# Altium PCB Charger.PcbDoc
Units mil, origin at the board's own origin, x right, y up, seen from the top; angles counter-clockwise.
Board outline 2000 x 1850 mil, 2 copper layers (Top Layer, Bottom Layer); 42 components, 28 nets, 114 pads, 23 vias.
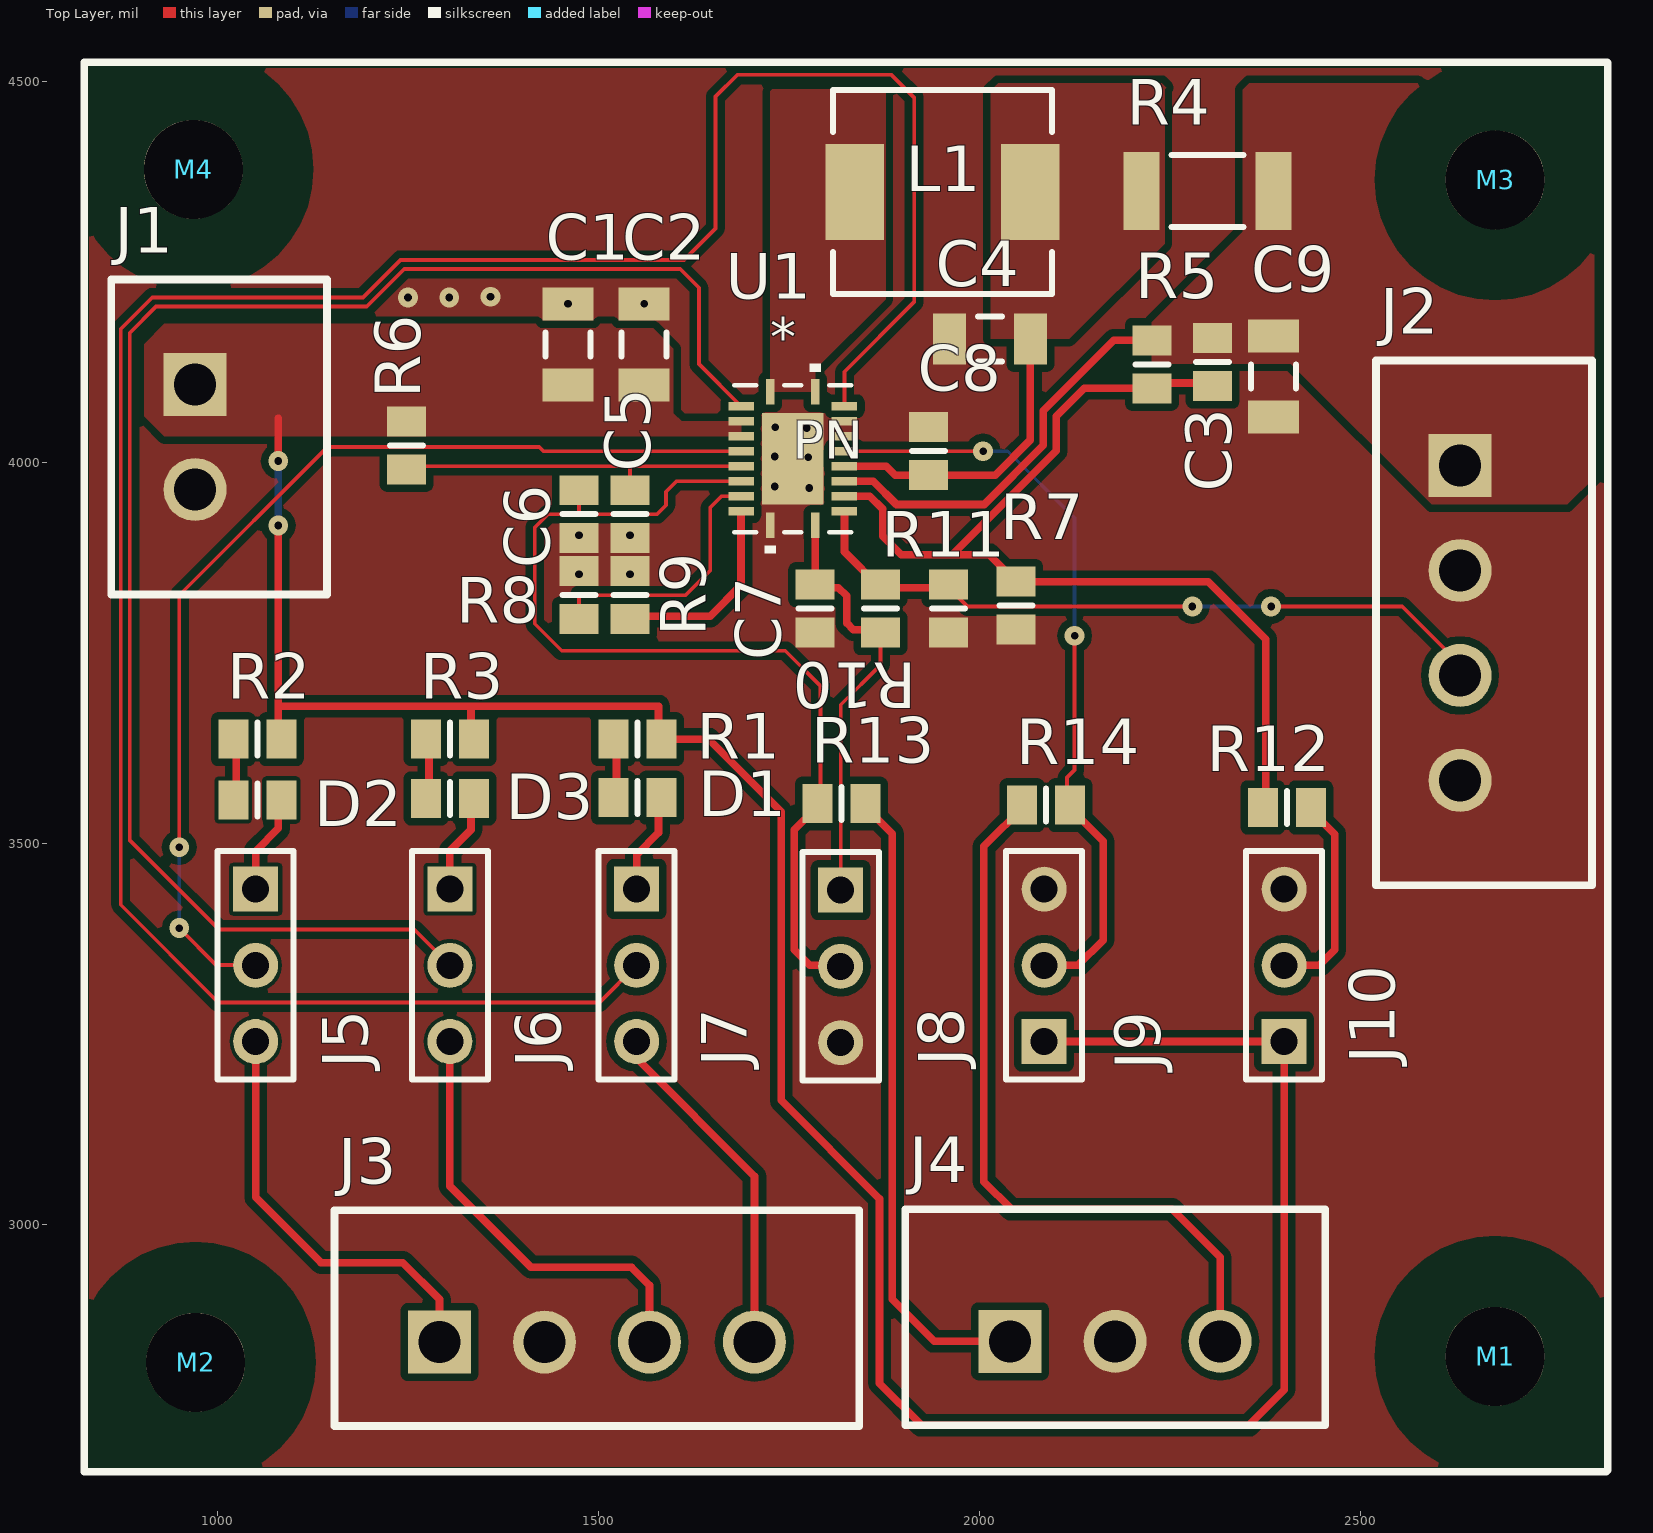
[diagram p0: Top Layer view]
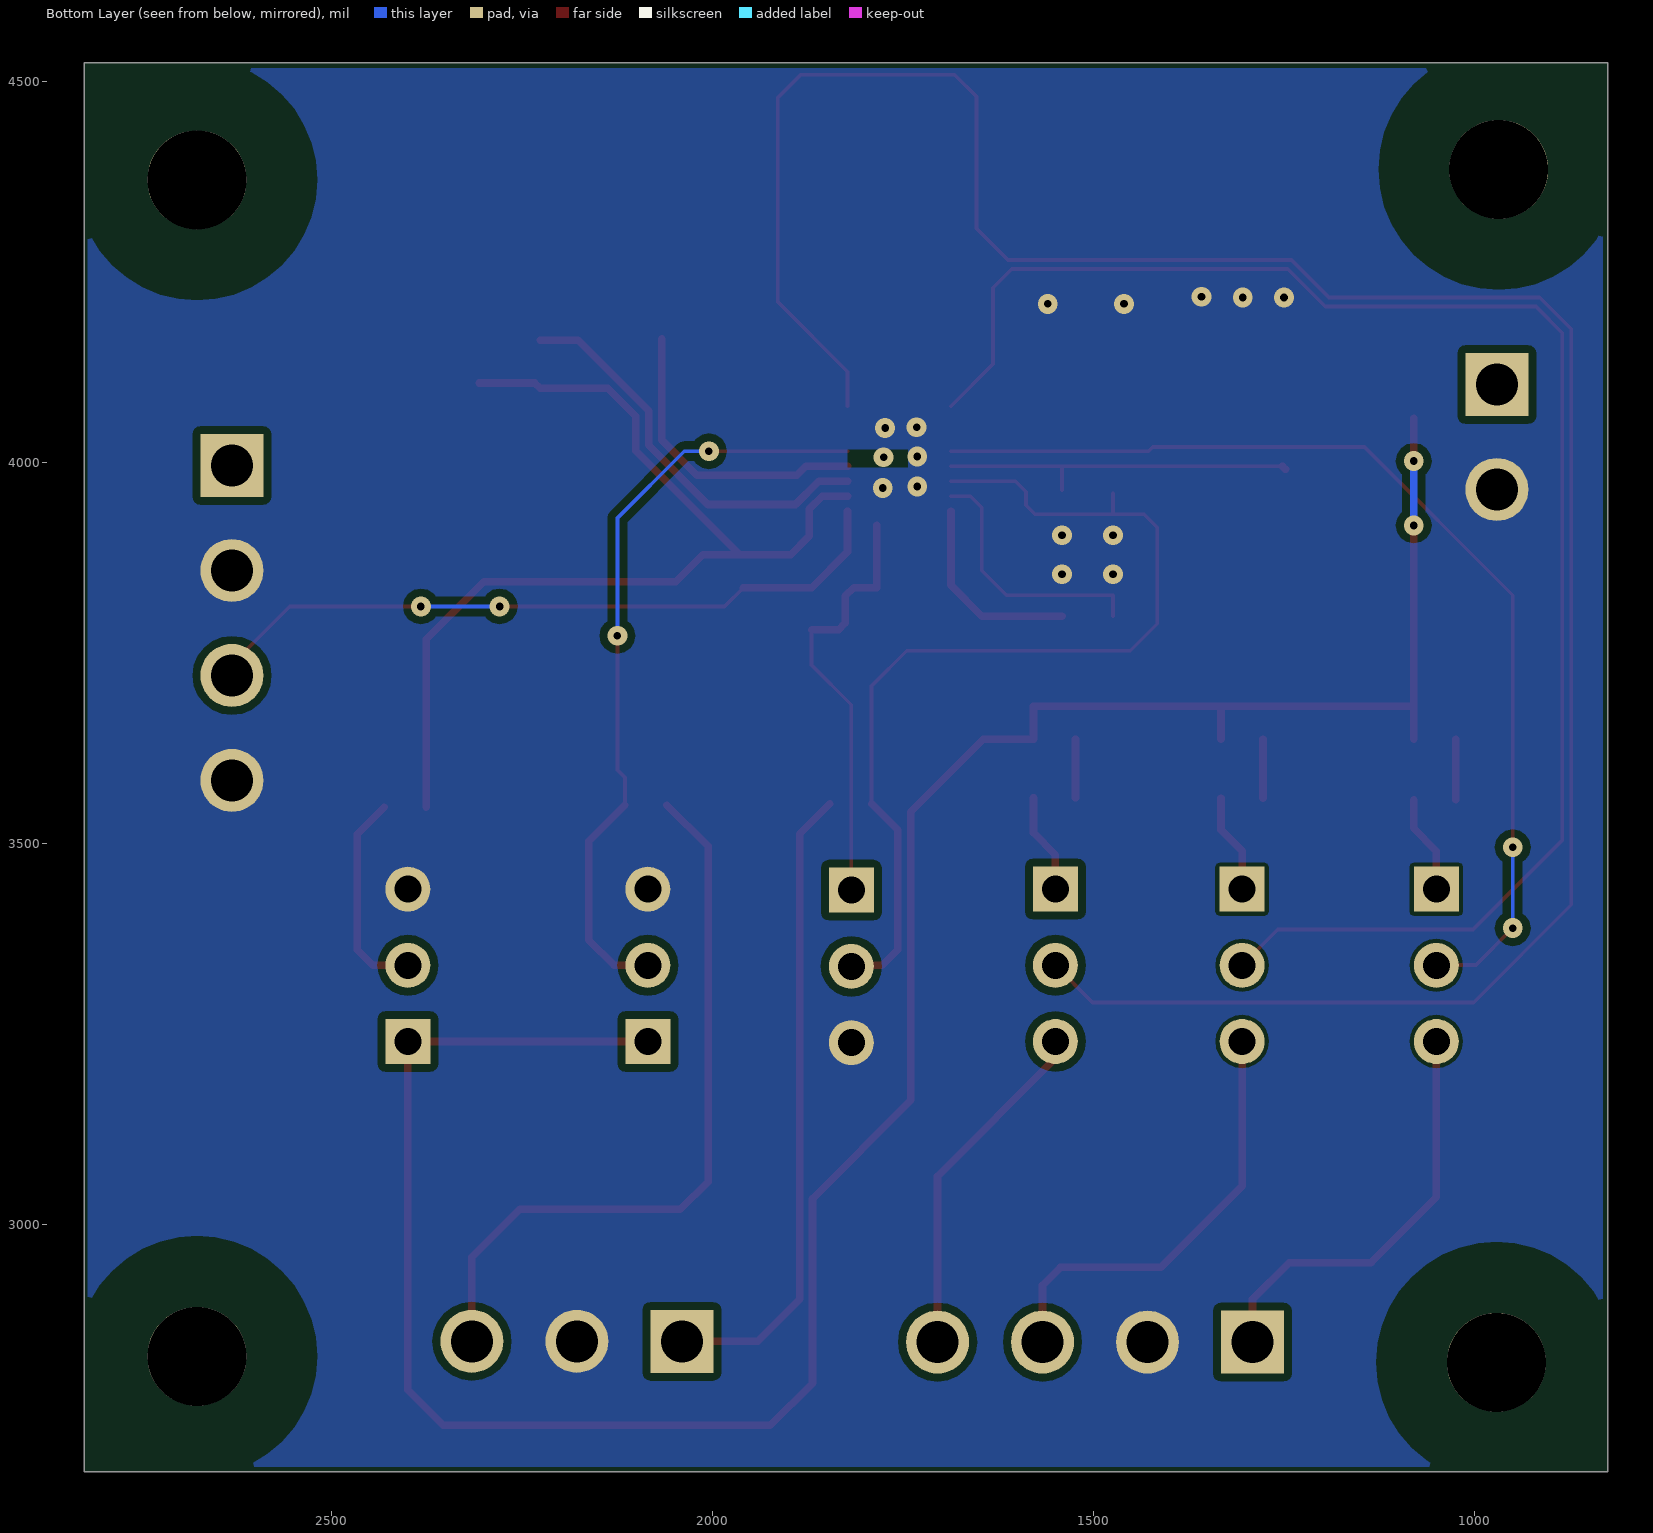
[diagram p1: Bottom Layer view, seen from below]

## Layer stack, top to bottom
Top Solder: solder mask 0.4, Solder Resist, Dk 3.5
Top Layer: signal copper 1.4
Dielectric 1: dielectric 12.6, FR-4, Dk 4.8
Bottom Layer: signal copper 1.4
Bottom Solder: solder mask 0.4, Solder Resist, Dk 3.5

## Board outline
825,2675 825,4525 2825,4525 2825,2675

## Design rules (kind name [scope] priority, off if disabled: settings)
AcuteAngle [All] p1: minimum=4.50000000000000E+0001 checktracksonly=FALSE
AssemblyTestPointUsage [All] p1: valid=2
Clearance Clearance_NetTie [TouchesRoom('U1')AND InNet('AGND') vs TouchesRoom('U1')AND InNet('PGND')] p1: gap=0 ignorepadtopadclearanceinfootprint=FALSE
Clearance Clearance_3 [All vs InComponent('D2')] p2: gap=5 ignorepadtopadclearanceinfootprint=FALSE except(0: Arc-Hole Track-Hole SMDPad-Hole THPad-Hole Via-Hole Fill-Hole Poly-Hole Region-Hole Text-Hole)
Clearance Clearance_2 [All vs InComponent('J5')] p3: gap=5 ignorepadtopadclearanceinfootprint=FALSE except(0: Arc-Hole Track-Hole SMDPad-Hole THPad-Hole Via-Hole Fill-Hole Poly-Hole Region-Hole Text-Hole)
Clearance Clearance_1 [All vs InComponent('J6')] p4: gap=5 ignorepadtopadclearanceinfootprint=FALSE except(0: Arc-Hole Track-Hole SMDPad-Hole THPad-Hole Via-Hole Fill-Hole Poly-Hole Region-Hole Text-Hole)
Clearance Clearance_Keepouts [((IsTrack Or IsArc) And Not InPoly) And IsFree and IsKeepOut vs ((IsTrack Or IsArc) And Not InPoly) And IsFree and IsKeepOut] p5: gap=0 ignorepadtopadclearanceinfootprint=FALSE
Clearance Clearance_BoardEdge_MountingHoles [OnCopper and InComponentClass('Mounting Holes') vs IsKeepOut] p6: gap=40 ignorepadtopadclearanceinfootprint=FALSE except(0: Arc-Hole Track-Hole SMDPad-Hole THPad-Hole Via-Hole Fill-Hole Poly-Hole Region-Hole Text-Hole)
Clearance Clearance_BoardEdge_Poly [OnCopper and InPoly vs IsKeepOut] p7: gap=20 ignorepadtopadclearanceinfootprint=FALSE except(0: Arc-Hole Track-Hole SMDPad-Hole THPad-Hole Via-Hole Fill-Hole Poly-Hole Region-Hole Text-Hole)
Clearance Clearance_BoardEdge [OnCopper and Not InComponentClass('Logo') and not InComponentClass('FiducialMark') and not InRegion(1000,500,4000,800) and Not IsKeepout vs IsKeepOut] p8: gap=20 ignorepadtopadclearanceinfootprint=FALSE except(0: Arc-Hole Track-Hole SMDPad-Hole THPad-Hole Via-Hole Fill-Hole Poly-Hole Region-Hole Text-Hole)
Clearance Clearance_Poly [InPolygon] p9: gap=10 ignorepadtopadclearanceinfootprint=FALSE except(0: Arc-Hole Track-Hole SMDPad-Hole THPad-Hole Via-Hole Fill-Hole Poly-Hole Region-Hole Text-Hole)
Clearance [All] p10: gap=7 ignorepadtopadclearanceinfootprint=FALSE except(0: Arc-Hole Track-Hole SMDPad-Hole THPad-Hole Via-Hole Fill-Hole Poly-Hole Region-Hole Text-Hole)
ComponentClearance ComponentClearance_L1L2 [InComponent('L1') vs InComponent('L2')] p1: gap=0 collisioncheckmode=3 verticalgap=0 showdistances=FALSE
ComponentClearance ComponentClearance_NetTie [InComponent('NT1') vs TouchesRoom('U1')] p2: gap=0 collisioncheckmode=3 verticalgap=0 showdistances=FALSE
ComponentClearance ComponentClearance_MountingHoles_FiducialMarks [InComponentClass('Mounting Holes') vs InComponentClass('FiducialMark')] p3: gap=50 collisioncheckmode=3 verticalgap=10 showdistances=FALSE
ComponentClearance ComponentClearance_Shunt [InComponentClass('Header') vs InComponentClass('Shunt')] p4: gap=0 collisioncheckmode=3 verticalgap=0 showdistances=FALSE
ComponentClearance ComponentClearance_Logo [InComponentClass('Logo')] p5: gap=50 collisioncheckmode=3 verticalgap=10 showdistances=FALSE
ComponentClearance ComponentClearance_ScrewToNut [(HasFootprint('NY PMS 440 0025 PH')) vs (HasFootprint('Keystone_1902C'))] p6: gap=5 collisioncheckmode=3 verticalgap=10 showdistances=FALSE
ComponentClearance ComponentClearance_MountingHoles [InComponentClass('Mounting Holes')] p7: gap=10 collisioncheckmode=3 verticalgap=0 showdistances=FALSE
ComponentClearance ComponentClearance_SmallPassives [HasFootprint('0201*') or HasFootprint('0402*') or HasFootprint('0508') or HasFootprint('0603*') or HasFootprint('0612') or HasFootprint('0805*') or HasFootprint('0815*') or HasFootprint('0830*') or HasFootprint('1206*') or HasFootprint('1210*') or HasFootprint('1808*') or HasFootprint('1812*') or HasFootprint('1825*') or HasFootprint('2010*') or HasFootprint('2220*') or HasFootprint('2225*') or HasFootprint('2512*') or HasFootprint('2728*') or HasFootprint('3518*') vs HasFootprint('0201*') or HasFootprint('0402*') or HasFootprint('0508') or HasFootprint('0603*') or HasFootprint('0612') or HasFootprint('0805*') or HasFootprint('0815*') or HasFootprint('0830*') or HasFootprint('1206*') or HasFootprint('1210*') or HasFootprint('1808*') or HasFootprint('1812*') or HasFootprint('1825*') or HasFootprint('2010*') or HasFootprint('2220*') or HasFootprint('2225*') or HasFootprint('2512*') or HasFootprint('2728*') or HasFootprint('3518*')] p8: gap=10 collisioncheckmode=3 verticalgap=10 showdistances=FALSE
ComponentClearance ComponentClearance_THtoSMT [IsThruComponent vs IsSMTComponent] p9: gap=10 collisioncheckmode=3 verticalgap=10 showdistances=FALSE
ComponentClearance ComponentClearance_THtoTH [IsThruComponent vs IsThruComponent] p10: gap=20 collisioncheckmode=3 verticalgap=30 showdistances=FALSE
ComponentClearance [All] p11: gap=8 collisioncheckmode=3 verticalgap=10 showdistances=FALSE
DiffPairsRouting [All] p1: maxlimit=100 minlimit=10 mostfreqgap=10 toplayer_minwidth=15 toplayer_maxwidth=15 toplayer_prefwidth=15 bottomlayer_minwidth=15 bottomlayer_maxwidth=15 bottomlayer_prefwidth=15 maxuncoupledlength=1000
FabricationTestPointUsage TestPointUsage [All] p1: valid=2 allowmultiple=FALSE
FabricationTestpoint Testpoint [All] p1: side=3 testpointundercomponent=TRUE minsize=40 maxsize=100 preferedsize=60 minholesize=0 maxholesize=40 preferedholesize=32 testpointgrid=1 allowsidetop=TRUE allowsidebottom=TRUE usegrid=TRUE gridtolerance=0.01
FanoutControl Fanout_LCC [IsLCC] p1: bgadir=Out bgaviamode=Centered fanoutstyle=Auto fanoutdirection=Alternating viagrid=1 // Fanout_LCC (Default Rule)
FanoutControl Fanout_BGA [IsBGA] p2: bgadir=Out bgaviamode=Centered fanoutstyle=Auto fanoutdirection=Alternating viagrid=1 // Fanout_BGA (Default Rule)
FanoutControl Fanout_Default [All] p4: bgadir=Out bgaviamode=Centered fanoutstyle=Auto fanoutdirection=Alternating viagrid=1 // Fanout_Default (Default Rule)
FanoutControl Fanout_Small [(CompPinCount < 5)] p5: bgadir=Out bgaviamode=Centered fanoutstyle=Auto fanoutdirection=OutThenIn viagrid=1 // Fanout_Small (Default Rule)
HoleSize [All] p1: absolutevalues=TRUE maxlimit=500 minlimit=7 maxpercent=80.000 minpercent=20.000
MinimumAnnularRing MinimumAnnularRing_ThermalPadVias [IsVia and InAnyComponent] p1: minimumring=4
MinimumAnnularRing [All] p2: minimumring=6
MinimumSolderMaskSliver MinimumSolderMaskSliver_Logo [InComponentClass('Logo') vs InComponentClass('Logo')] p1: minsoldermaskwidth=0.7
MinimumSolderMaskSliver [All] p2: minsoldermaskwidth=3
PlaneClearance [All] p1: clearance=10
PlaneConnect [All] p1: planeconnectstyle=Direct reliefexpansion=10 reliefentries=4 reliefconductorwidth=10 reliefairgap=10
PolygonConnect [All] p1: connectstyle=Direct reliefconductorwidth=10 reliefentries=4 polygonreliefangle="90 Angle" airgapwidth=10
RoutingCorners [All] p1: cornerstyle=45-Degree minsetback=10 maxsetback=100
RoutingVias ThermalPadVias [IsVia and InAnyComponent] p1: holewidth=10 width=26 viastyle="Through Hole" minholewidth=6 minwidth=19 maxholewidth=100 maxwidth=200
RoutingVias [All] p2: holewidth=10 width=26 viastyle="Through Hole" minholewidth=6 minwidth=8 maxholewidth=200 maxwidth=300
SMDToCorner [All] p1: distance=0
ShortCircuit ShortCircuit_NetTie [TouchesRoom('U1') and InNet('AGND') vs TouchesRoom('U1') and InNet('PGND')] p1: allowed=TRUE
ShortCircuit [All] p2: allowed=FALSE
SilkToSilkClearance SilkToSilkClearance_Pb-FreeLogo [(HasFootprint('Pb-Free_Overlay_Medium') OR HasFootprint('Pb-Free_Overlay_Small')) vs (HasFootprint('Pb-Free_Overlay_Medium') OR HasFootprint('Pb-Free_Overlay_Small'))] p1: silktosilkclearance=0
SilkToSilkClearance [All] p2: silktosilkclearance=5
SilkToSolderMaskClearance SilkscreenOverComponentPads [IsPad] p1: minsilkscreentomaskgap=3 clearancetoexposedcopper=TRUE
SolderMaskExpansion [All] p1: expansion=0
Width [All] p1: maxlimit=100 minlimit=5 preferedwidth=10 checkconnectedcopper=TRUE
13 further rules are at their usual default settings.

## Classes and differential pairs
component class CarterCharger: C1 C2 C3 C4 C5 C6 C7 C8 C9 D1 D2 D3 J1 J2 J3 J4 J5 J6 J7 J8 J9 J10 L1 R1 R2 R3 R4 R5 R6 R7 R8 R9 R10 R11 R12 R13 R14 U1

## Components (designator, comment, footprint, x,y, rotation, side; value= is the part's Value field where it differs from the comment)
C1 "" CAPC3216L 1460,4155 r270 top value=10iF
C2 "" CAPC3216L 1560,4155 r270 top value=10uF
C3 "" 6-0805_L 2306.1,4131.89 r270 top value=0.1uF
C4 "" CAPC3216L 2013.78,4162.4 r180 top value=0.1uF
C5 "" 6-0805_L 1541.34,3932.09 r270 top value=0.1uF
C6 "" 6-0805_L 1474.41,3932.09 r270 top value=0.1uF
C7 "" 6-0805_L 1784.45,3808.07 r270 top value=0.1uF
C8 "" 6-0805_L 1933.49,4014.84 r90 top value=0.1uF
C9 "" CAPC3216L 2385.83,4113.19 r270 top value=0.1uF
D1 "green" 6-0805_L 1551.18,3560.04 r0 top
D2 "green" 6-0805_L 1052.17,3557.09 r0 top
D3 "red" 6-0805_L 1305.12,3559.06 r0 top
J1 "Header 2" 691305130002 1001.97,4033.46 r270 top
J2 "Header 4" 691305130004 2662.4,3789.37 r270 top
J3 "Header 4" 691305130004 1498.03,2876.97 r0 top
J4 "Header 3" 691305130003 2178.15,2877.95 r0 top
J5 "Header 3" HDR1X3 1050,3440 r270 top
J6 "Header 3" HDR1X3 1305,3440 r270 top
J7 "Header 3" HDR1X3 1550,3440 r270 top
J8 "Header 3" HDR1X3 1817.91,3438.58 r270 top
J9 "Header 3" HDR1X3 2085,3240 r90 top
J10 "Header 3" HDR1X3 2400,3240 r90 top
L1 "Inductor" IND2926 1951.77,4355.31 r0 top value=10uH
M1 "M3_MOUNT" M3_MTG 2676.83,2826.76 r0 top
M2 "M3_MOUNT" M3_MTG 971.13,2818.88 r0 top
M3 "M3_MOUNT" M3_MTG 2676.83,4371.05 r0 top
M4 "M3_MOUNT" M3_MTG 968.17,4384.83 r0 top
R1 "" 6-0805_L 1551.18,3636.81 r180 top value=1.5K
R2 "" 6-0805_L 1052.17,3636.81 r180 top value=1.5K
R3 "" 6-0805_L 1305.12,3636.81 r180 top value=1.5K
R4 "0.5W" 12Z-2010 2299.21,4356.3 r0 top value=0.1
R5 "" 6-0805_L 2226.38,4128.94 r270 top value=200K
R6 "CRCW0603-00R0-F" 6-0805_L 1248.03,4022.64 r270 top value=0
R7 "" 6-0805_L 2048.23,3812.01 r270 top value=200K
R8 "" 6-0805_L 1474.41,3825.79 r270 top value=7.5K
R9 "" 6-0805_L 1541.34,3825.79 r270 top value=7.5K
R10 "" 6-0805_L 1870.08,3808.07 r270 top value=4.99K
R11 "" 6-0805_L 1959.65,3808.07 r90 top value=10K
R12 "" 6-0805_L 2403.54,3547.24 r180 top value=0
R13 "" 6-0805_L 1818.9,3552.17 r180 top value=10K
R14 "" 6-0805_L 2087.6,3550.2 r0 top value=10K
U1 "BQ24103ARHLR" RHL20_2P05X3P05 1755,4005 r0 top value=Value

## Footprints (in the part's own frame and the unit in brackets; to place one, negate y for a bottom-side part, rotate by r counter-clockwise, add the part's x,y. Pads: shape width x height; smd on the part's side, far side on the other; paste and mask are expansions set on the pad)
6-0805_L [mm] "Chip Resistor, Body 2.0x1.2mm, IPC High Density"
  rect 1x1.3 smd: 1(-0.8,0) 2(0.8,0)
  silkscreen extent 0,-0.55 0,0.55, body extent -1.07,-0.7 1.07,0.7, height 0.7
12Z-2010 [mm] "Chip Resistor, Body 5.0x2.5mm, IPC High Density"
  rect 1.2x2.6 smd: 1(-2.2,0) 2(2.2,0)
  silkscreen extent -1.2,-1.2 1.2,1.2, body extent -2.58,-1.33 2.58,1.33, height 0.9
691305130002 [mm] "Vertical PCB Header with Plastic Latch, pitch 3.5mm, 02p"
  rect 2.1x2.1 hole 1.4: 1(-1.75,-0.8)
  round 2.1 hole 1.4: 2(1.75,-0.8)
  silkscreen extent -5.25,-3.6 5.25,3.6, body extent -5.25,-3.6 5.25,3.6, height 9.25
691305130003 [mm] "Vertical PCB Header with Plastic Latch, pitch 3.5mm, 03p"
  rect 2.1x2.1 hole 1.4: 1(-3.5,-0.8)
  round 2.1 hole 1.4: 2(0,-0.8) 3(3.5,-0.8)
  silkscreen extent -7,-3.6 7,3.6, body extent -7,-3.6 7,3.6, height 9.25
691305130004 [mm] "Vertical PCB Header with Plastic Latch, pitch 3.5mm, 04p"
  rect 2.1x2.1 hole 1.4: 1(-5.25,-0.8)
  round 2.1 hole 1.4: 2(-1.75,-0.8) 3(1.75,-0.8) 4(5.25,-0.8)
  silkscreen extent -8.75,-3.6 8.75,3.6, body extent -8.75,-3.6 8.75,3.6, height 9.25
CAPC3216L [mm] "Chip Capacitor, Body 3.2x1.6mm, IPC High Density"
  rect 1.1x1.7 smd: 1(-1.35,0) 2(1.35,0)
  silkscreen extent -0.4,-0.75 0.4,0.75, body extent -1.7,-0.9 1.7,0.9, height 1.35
HDR1X3 [mm] "Connector; Header; 3 Position"
  rect 1.5x1.5 hole 0.9: 1(0,0)
  round 1.5 hole 0.9: 2(2.54,0) 3(5.08,0)
  silkscreen extent -1.27,-1.27 6.35,1.27
IND2926 [mm] "SM Inductor; 2 Leads; Body 7.3x6.6mm (LxW)"
  rect 1.95x3.2 smd: 1(-2.925,0) 2(2.925,0)
  silkscreen extent -3.65,-3.4 3.65,3.4, body extent -3.65,-3.4 3.65,3.4, height 3
M3_MTG [mm]
  round 7 on Keep-Out: Mounting(0,0)
  round 3.3 hole 3.3 unplated: ""(0,0)
RHL20_2P05X3P05 [mm]
  rect 0.28x0.85 smd paste-0.14: 1(-0.75,2.225) 10(-0.75,-2.225) 11(0.75,-2.225) 20(0.75,2.225)
  rect 0.85x0.28 smd paste-0.14: 2(-1.725,1.75) 3(-1.725,1.25) 4(-1.725,0.75) 5(-1.725,0.25) 6(-1.725,-0.25) 7(-1.725,-0.75) 8(-1.725,-1.25) 9(-1.725,-1.75) 12(1.725,-1.75) 13(1.725,-1.25) 14(1.725,-0.75) 15(1.725,-0.25) 16(1.725,0.25) 17(1.725,0.75) 18(1.725,1.25) 19(1.725,1.75)
  rect 2.05x3.05 smd paste-1.512 mask-1.511: 21(0,0)
  silkscreen extent -1.95,-3.16 1.95,3.16, body extent -1.88,-2.38 1.88,2.38, height 1

## Part data
C1 C2 C3 C4 C5 C6 C7 C8 C9: library part Cap, "Capacitor", LatestRevisionDate=17-Jul-2002, LatestRevisionNote="Re-released for DXP Platform.", PackageDescription="Radial Cap, Thru-Hole; 2 Leads; 0.3 in Pin Spacing", Published=8-Jun-2000, Publisher="Altium Limited"
  C1 C2 C4 C9: PackageReference=CAPC3216L
  C3 C5 C6 C7 C8: PackageReference=0603
D1 D2 D3: library part LED2, "Typical RED, GREEN, YELLOW, AMBER GaAs LED", LatestRevisionDate=17-Jul-2002, LatestRevisionNote="Re-released for DXP Platform.", PackageDescription="SM LED; 2 Flat Leads", PackageReference=0603, PackageVersion=Feb-2002, Published=8-Jun-2000, Publisher="Altium Limited"
J1: "Header, 2-Pin", LatestRevisionDate=17-Jul-2002, LatestRevisionNote="Re-released for DXP Platform.", Publisher="Altium Limited"
J2 J3: "Header, 4-Pin", LatestRevisionDate=17-Jul-2002, LatestRevisionNote="Re-released for DXP Platform.", Publisher="Altium Limited"
J4 J5 J6 J7 J8 J9 J10: "Header, 3-Pin", LatestRevisionDate=17-Jul-2002, LatestRevisionNote="Re-released for DXP Platform.", Publisher="Altium Limited"
R1 R2 R3 R4 R5 R6 R7 R8 R9 R10 R11 R12 R13 R14: library part Res1, "Resistor", LatestRevisionDate=17-Jul-2002, LatestRevisionNote="Re-released for DXP Platform.", PackageDescription="Axial Device, Thru-Hole; 2 Leads; 0.3 in Pin Spacing", Published=8-Jun-2000, Publisher="Altium Limited"
  R1 R2 R3 R6 R8 R9 R10 R11 R12 R13 R14: PackageReference=0603
  R4 R5 R7: PackageReference=AXIAL-0.3
U1: "Imported", Manufacturer="Texas Instruments", PACKAGE_DESIGNATOR=RHL, 3D_Library_Name=TI_AllParts_2012-12-25, C="Copyright (C) 2015 Accelerated Designs. All rights reserved", Copyright="Copyright (C) 2015 Accelerated Designs. All rights reserved", Datasheet_URL=http://www.ti.com/lit/gpn/BQ24103A, FAMILY_NAME="BATTERY CHARGE MANAGEMENT", GENERIC_PART_NUMBER=BQ24103A, INDUSTRY_STD_PKG_TYPE=QFN, Manufacturer_Part_Number=BQ24103ARHLR, PIN_COUNT=20, RefDes=RefDes, Type=Type, Vendor=Vendor
L1: Code_IEC=1005, Code_JEITA=0402, LatestRevisionDate=29-May-2009, LatestRevisionNote="IPC-7351 Footprint Added.", PackageDescription="Chip Inductor", PackageReference=0402-A, Published=8-Jun-2000, Publisher="Altium Limited"

## Via types
v1: diameter 26, hole 10, Top Layer to Bottom Layer, tented both sides, 15 vias
v2: diameter 26, hole 10, Top Layer to Bottom Layer, 8 vias

## Nets (pads, with @x,y where several pads share a name; then routed paths per layer and width w, separated by ;. In a path a pad name is that pad's centre, name@x,y a point inside that pad or via, vN(x,y) a via of type N, cw(c..) or ccw(c..) an arc to the next point about the centre after c; other vN are vias at no path point)
GND: C1.1 C2.1 C4.2 C5.2 C6.2 C7.2 C8.2 C9.2 J1.2 J2.2 J2.4 J3.2 J4.2 J8.3 J9.3 J10.3 R7.2 R8.1 R9.1 R11.1 U1.10 U1.17 U1.18 U1.21
  other v1: 1474.41,3853.35 1541.34,3853.35 1474.41,3904.53 1541.34,3904.53 1776.57,3966.54 1731.3,3968.5 1775.59,4006.89 1731.3,4007.87 1773.62,4045.28 1732.28,4046.26 1460,4208.15 1560,4208.15 1250,4216.54 1304.13,4216.54 1358.27,4217.52
NetC1_2: C1.2 C2.2 J1.1 J9.1 J10.1 R1.1 R2.1 R3.1 R6.1 U1.3 U1.4 | length 3357.3
  Top Layer w10: R2.1@1079.72,3636.81 1079.72,3679.13 ; v2(1079.72,3917.32) 1079.72,3679.13 ; v2(1079.72,4001.97) 1079.72,4058.07 ; R3.1@1332.68,3636.81 1332.68,3679.13 1333.66,3680.12 ; J9.1 J10.1 2400,2782.87 2353.35,2736.22 1924.21,2736.22 1868.83,2791.61 1868.83,3033.73 1739.89,3162.67 1739.89,3541.61 1644.69,3636.81 1578.74,3636.81 1578.74,3680.12 1333.66,3680.12 ; 1079.72,3679.13 1080.71,3680.12 1333.66,3680.12
  Bottom Layer w10: v2(1079.72,3917.32) v2(1079.72,4001.97)
NetC3_1: C3.1 C9.1 J2.1 R4.2 R5.1 U1.14 | length 532
  Top Layer w10: U1.14 1860.58,3975.47 1891.17,3944.88 2006.33,3944.88 2083.93,4022.49 2083.93,4067.91 2176.45,4160.43 R5.1
NetC3_2: C3.2 R5.2 R7.1 R12.2 U1.13 | length 1333.9
  Top Layer w10: U1.13 1856.22,3955.79 1873.03,3938.98 1873.03,3903.54 1897.64,3878.94 1964.42,3878.94 ; C3.2@2306.1,4104.33 2233.27,4104.33 R5.2 2137.5,4097.44 2100.93,4060.87 2100.93,4015.44 1964.42,3878.94 ; R12.2@2375.98,3547.24 2375.98,3767.72 2300.2,3843.5 R7.1 2012.8,3878.94 1964.42,3878.94
NetC4_1: C4.1 C8.1 L1.2 R4.1 U1.15 | length 400.9
  Top Layer w10: U1.15 1877.87,3995.16 1889.68,3983.35 C8.1 2020.75,3983.35 2066.93,4029.53 C4.1
NetC5_1: C5.1 R6.2 U1.6 | length 472.7
  Top Layer w5: R6.2@1251.97,3995.08 1400.59,3995.08 1400.67,3995.16 1540.35,3995.16 ; C5.1 1541.34,3994.17 1540.35,3995.16 ; U1.6 1540.35,3995.16
  Top Layer w10: R6.2 R6.2@1251.97,3995.08
NetC6_1: C6.1 J8.2 R13.2 U1.7 | length 1299.7
  Top Layer w5: C6.1@1474.41,3959.65 1474.41,3932.09 ; U1.7 1602.44,3975.47 1588.58,3961.61 1588.58,3943.9 1576.77,3932.09 1474.41,3932.09 ; R13.2@1791.34,3552.17 1791.34,3706.69 1745.08,3752.95 1451.77,3752.95 1416.34,3788.39 1416.34,3914.68 1433.75,3932.09 1474.41,3932.09
  Top Layer w10: R13.2@1791.34,3552.17 1756.89,3517.72 1756.89,3360.24 1777.13,3340 1816.5,3340 J8.2
NetC7_1: C7.1 J8.1 R10.2 U1.11 | length 574.6
  Top Layer w5: U1.11@1784.45,3917.32 U1.11 ; J8.1 1817.91,3682.09 1870.08,3734.25 R10.2@1870.08,3780.51
  Top Layer w10: U1.11@1784.45,3917.32 1784.45,3835.63 1814.96,3835.63 1825.79,3824.8 1825.79,3789.37 1834.65,3780.51 R10.2@1870.08,3780.51
NetD1_1: D1.1 R1.2 | length 76.8
  Top Layer w10: D1.1@1523.62,3560.04 R1.2@1523.62,3636.81
NetD1_2: D1.2 J7.1 | length 131.9
  Top Layer w10: J7.1 1550,3485.04 1578.74,3513.78 D1.2@1578.74,3560.04
NetD2_1: D2.1 R2.2 | length 79.7
  Top Layer w10: D2.1@1024.61,3557.09 R2.2@1024.61,3636.81
NetD2_2: D2.2 J5.1 | length 129.4
  Top Layer w10: J5.1 1050,3489.96 1079.72,3519.69 D2.2@1079.72,3557.09
NetD3_1: D3.1 R3.2 | length 77.8
  Top Layer w10: D3.1@1277.56,3559.06 R3.2@1277.56,3636.81
NetD3_2: D3.2 J6.1 | length 130.5
  Top Layer w10: J6.1 1305,3490.04 1332.68,3517.72 D3.2@1332.68,3559.06
NetJ2_3: J2.3 R10.1 R11.2 U1.12 | length 937.2
  Top Layer w5: R11.2@1959.65,3835.63 1984.25,3811.02 v2(2279.53,3811.02) ; v2(2382.87,3811.02) 2555.12,3811.02 2630.91,3735.24 J2.3
  Top Layer w10: U1.12 1822.91,3882.8 1870.08,3835.63 R11.2@1959.65,3835.63
  Bottom Layer w5: v2(2279.53,3811.02) v2(2382.87,3811.02)
NetJ3_1: J3.1 J5.3 | length 557.3
  Top Layer w10: J5.3 1050,3035.63 1135.83,2949.8 1243.11,2949.8 1291.34,2901.57 J3.1
NetJ3_3: J3.3 J6.3 | length 580.3
  Top Layer w10: J6.3 1305,3050.31 1411.42,2943.9 1543.31,2943.9 1566.93,2920.28 J3.3
NetJ3_4: J3.4 J7.3 | length 458.6
  Top Layer w10: J7.3 1550,3217.72 1704.72,3062.99 J3.4
NetJ4_1: J4.1 R13.1 | length 844.3
  Top Layer w10: R13.1@1846.46,3552.17 1885.83,3512.8 1885.83,2901.57 1940.94,2846.46 J4.1
NetJ4_3: J4.3 R14.1 | length 978
  Top Layer w10: R14.1@2060.04,3550.2 2005.91,3496.06 2005.91,3056.1 2042.32,3019.68 2252.95,3019.68 2315.95,2956.69 J4.3
NetJ5_2: J5.2 U1.5 | length 1377.5
  Top Layer w5: v2(949.8,3388.78) 998.03,3340.55 1049.45,3340.55 J5.2 ; v2(949.8,3495.08) 949.8,3825.79 1144.34,4020.33 1422.24,4020.33 1427.73,4014.84 U1.5
  Bottom Layer w5: v2(949.8,3388.78) v2(949.8,3495.08)
NetJ6_2: J6.2 U1.2 | length 2124.6
  Top Layer w5: J6.2 1258.19,3386.81 1001.97,3386.81 884.84,3503.94 884.84,4170.28 919.29,4204.72 1195.87,4204.72 1245.08,4253.94 1607.28,4253.94 1631.89,4229.33 1631.89,4129.09 U1.2
NetJ7_2: J7.2 U1.19 | length 3242.8
  Top Layer w5: J7.2 1501.34,3291.34 1000.98,3291.34 872.84,3419.48 872.84,4175.25 914.32,4216.72 1190.9,4216.72 1240.11,4265.94 1612.25,4265.94 1653.54,4307.23 1653.54,4480.31 1682.09,4508.86 1884.84,4508.86 1914.37,4479.33 1914.37,4210.63 1822.91,4119.17 U1.19
NetJ9_2: J9.2 R14.2 U1.16 | length 1015
  Top Layer w5: U1.16 v2(2004.84,4014.84) v2@1999.36,4020.33 ; R14.2@2115.16,3550.2 2115.16,3586.61 2125,3596.46 v2(2125,3772.64)
  Top Layer w10: J9.2 2129.37,3340 2162.4,3373.03 2162.4,3502.95 R14.2@2115.16,3550.2
  Bottom Layer w5: v2(2004.84,4014.84) 2037.32,4014.84 2125,3927.17 v2(2125,3772.64)
NetJ10_2: J10.2 R12.1 | length 276.6
  Top Layer w10: J10.2 2446.3,3340 2466.54,3360.24 2466.54,3511.81 R12.1@2431.1,3547.24
NetL1_1: L1.1 U1.1 U1.20
NetR8_2: R8.2 U1.8 | length 342.5
  Top Layer w5: R8.2@1474.41,3798.23 1474.41,3825.79 1614.17,3825.79 1646.65,3858.27 1646.65,3940.94 1661.5,3955.79 U1.8
NetR9_2: R9.2 U1.9 | length 259.9
  Top Layer w10: R9.2@1541.34,3798.23 1646.65,3798.23 1687.09,3838.66 U1.9
pads on no net: M1. M1.Mounting M2. M2.Mounting M3. M3.Mounting M4. M4.Mounting

## Polygon pours and split planes (outlines as drawn)
GND on Bottom Layer "GND" (solid, pour order 12): 831.69,4517.72 831.69,2682.09 2819.88,2682.09 2819.88,4517.72
GND on Top Layer "GND" (solid, pour order 10): 831.69,4517.72 831.69,2682.09 2819.88,2682.09 2819.88,4517.72
NetC1_2 on Top Layer "Power" (solid, pour order 0): 1687.09,4034.53 1687.01,4034.45 930.12,4034.45 903.54,4061.02 903.54,4155.51 930.12,4182.09 1565.94,4182.09 1598.43,4149.61 1598.43,4064.96 1609.17,4054.21 1687.09,4054.21
NetC4_1 on Top Layer "SNS" (solid, pour order 2): 2014.76,4162.4 2014.76,4486.22 2013.78,4487.2 2024.61,4498.03 2239.17,4498.03 2245.08,4492.13 2243.11,4490.16 2243.11,4287.4 2118.11,4162.4
NetC3_1 on Top Layer "BAT+" (solid, pour order 6): 2226.38,4184.06 2345.47,4303.15 2345.47,4489.17 2354.33,4498.03 2792.32,4498.03 2807.09,4483.27 2807.09,3980.31 2771.65,3944.88 2593.5,3944.88 2408.46,4129.92 2227.36,4129.92 2226.38,4130.91
NetL1_1 on Top Layer "BAT+" (solid, pour order 8): 1725.47,4092.6 1784.53,4092.6 1784.53,4122.13 1876.97,4214.57 1876.97,4490.16 1728.35,4490.16 1725.47,4487.28

## Silkscreen, mask and mechanical layers (free items; w line width, h text height)
Top Overlay:
  lines w10: 824.8,2675.2 2822.83,2675.2 2824.8,2677.17 2824.8,4524.61 2823.82,4525.59 824.8,4525.59 824.8,2675.2

## Text inside footprints (layer, text, board x,y; h text height)
U1: Top Overlay "PN" at 1755,4005 h50; Top Overlay "*" at 1725.47,4140.33 h50; Mechanical 13 "*" at 1725.47,4075.87 h50; Multi-Layer "Copyright (C) 2015 Accelerated Designs. All rights reserved" at 1755,4005 h1